# Altium PCB STC8051.PcbDoc
Units mil, origin at the board's own origin, x right, y up, seen from the top; angles counter-clockwise.
Board outline 1970 x 1985 mil, 2 copper layers (Top Layer, Bottom Layer); 31 components, 52 nets, 177 pads, 0 vias.
Unrouted connection lines stored in the file: 95.
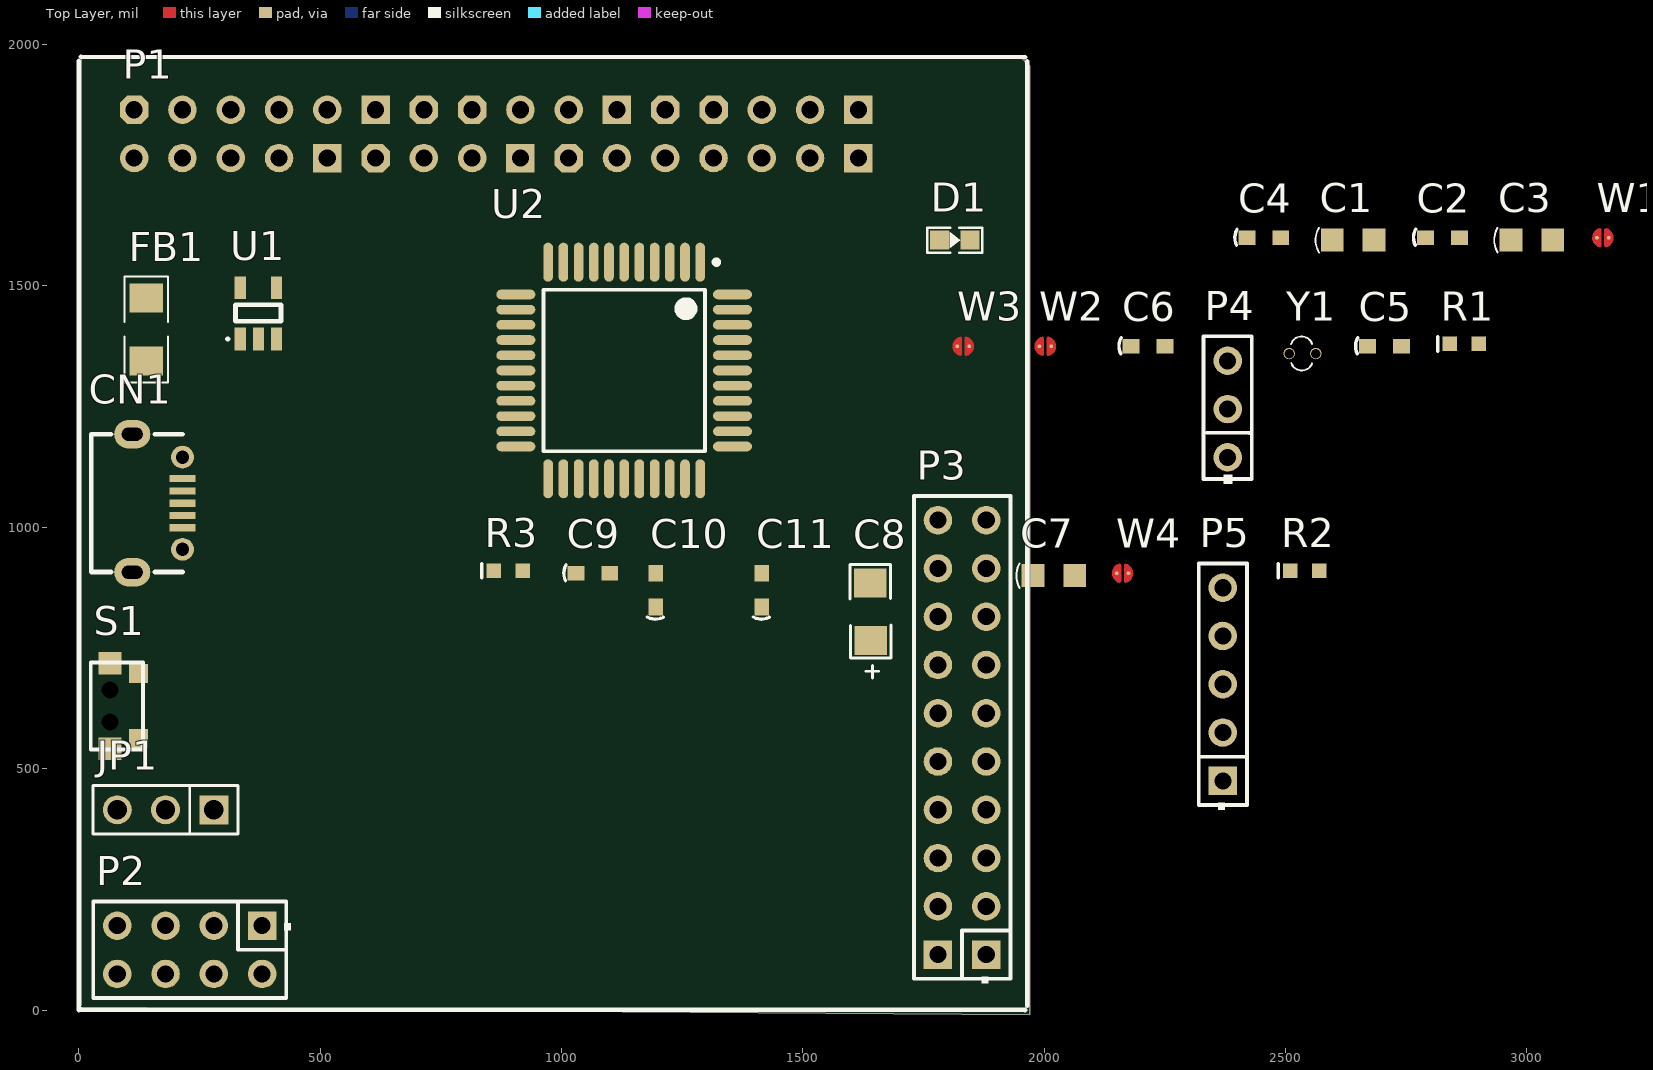
[diagram p0: Top Layer view]
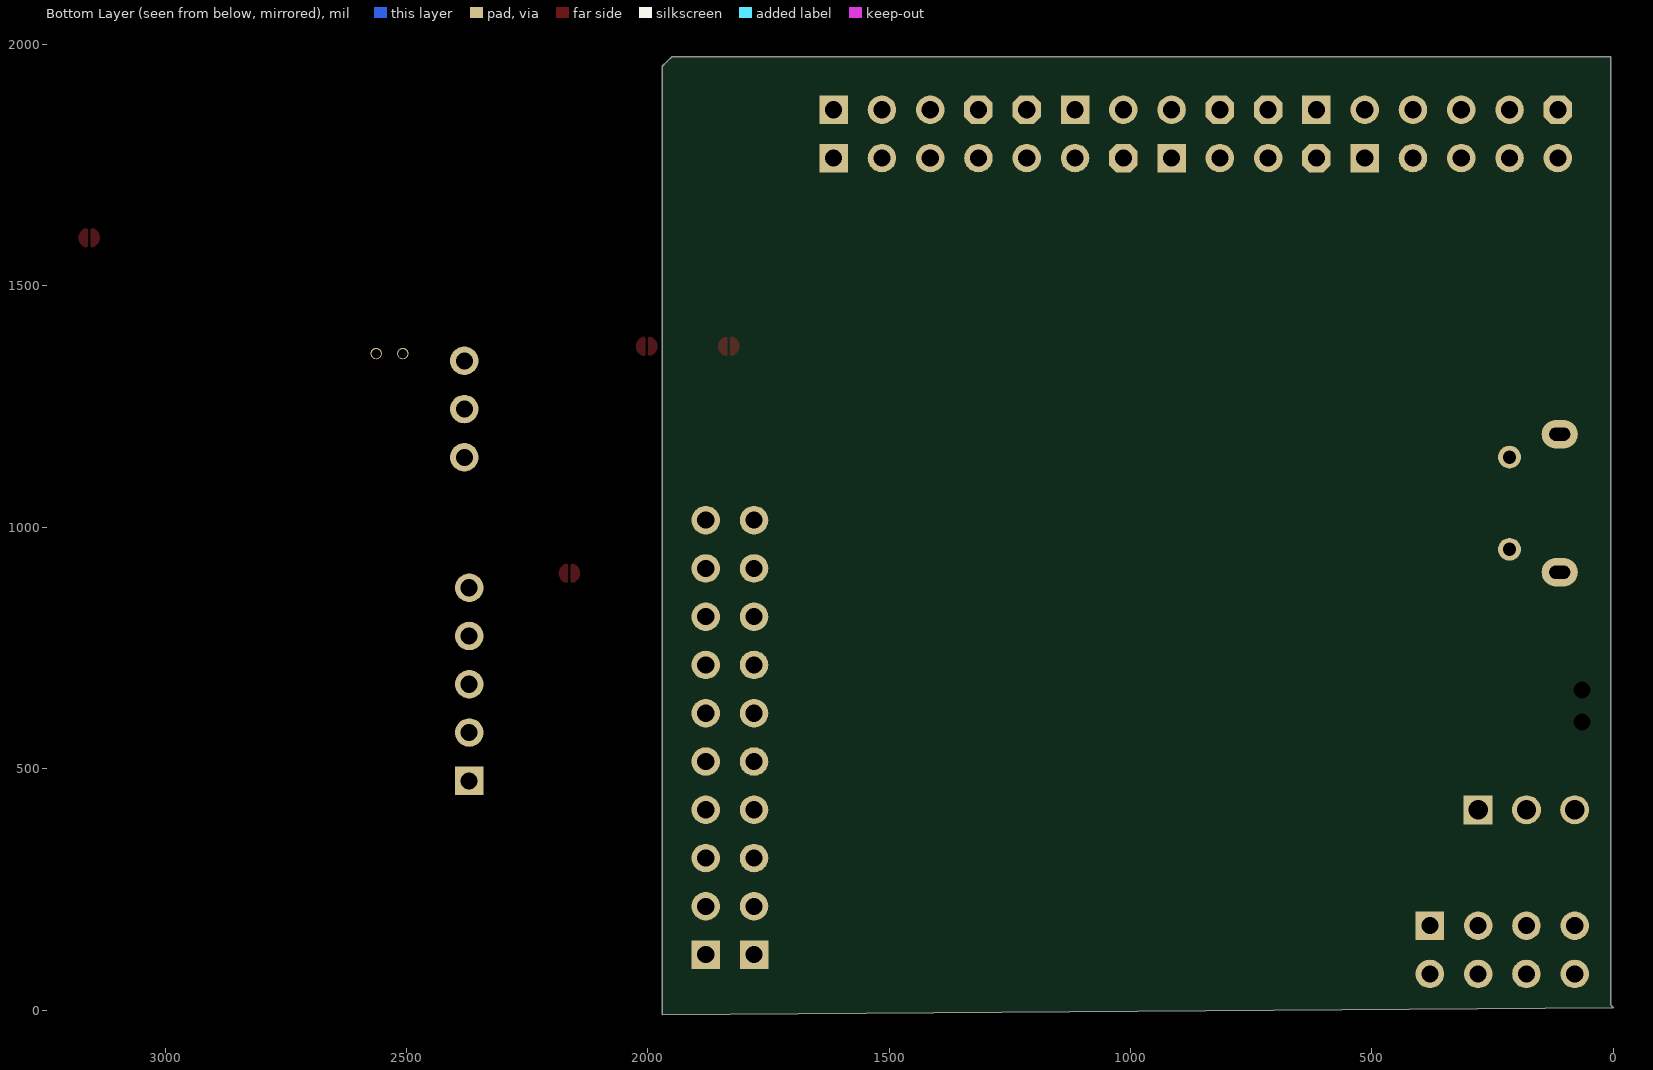
[diagram p1: Bottom Layer view, seen from below]

## Layer stack, top to bottom
Top Solder: solder mask 0.4, Solder Resist, Dk 3.5
Top Layer: signal copper 1.4
Dielectric 1: dielectric 12.6, FR-4, Dk 4.8
Bottom Layer: signal copper 1.4
Bottom Solder: solder mask 0.4, Solder Resist, Dk 3.5

## Board outline
0,5 5,10 5,1975 1950,1975 1960,1965 1970,1955 1970,-10

## Design rules (kind name [scope] priority, off if disabled: settings)
Clearance [All] p1: gap=10
PolygonConnect [All] p1: connectstyle=Relief reliefconductorwidth=10 reliefentries=4 polygonreliefangle="90 Angle" airgapwidth=10
RoomDefinition 8051 [InComponentClass('8051')] p1: confinementstyle=ConfineIn formatcopy=TRUE lockcomponents=FALSE outline -10,5 1985,5 1985,1980 -10,1980
RoutingVias [All] p1: holewidth=28 width=50 viastyle="Through Hole" minholewidth=28 minwidth=50 maxholewidth=28 maxwidth=50
SolderMaskExpansion [All] p1: expansion=4
Width [All] p1: maxlimit=10 minlimit=10 preferedwidth=10
29 further rules are at their usual default settings.

## Components (designator, comment, footprint, x,y, rotation, side; value= is the part's Value field where it differs from the comment)
C1 "10uF" C0805 2640,1595 r0 top
C2 "100nF" C0603L 2825,1600 r0 top
C3 "10uF" C0805 3010,1595 r0 top
C4 "100nF" C0603L 2455,1600 r0 top
C5 "22pF" C0603L 2705,1375 r0 top
C6 "22pF" C0603L 2215,1375 r0 top
C7 "10uF" C0805 2020,900 r0 top
C8 "10uF" TAJ-A 1640,775 r90 top
C9 "1uF" C0603L 1065,905 r0 top
C10 "0.1uF" C0603L 1195,870 r90 top
C11 "0.1uF" C0603L 1415,870 r90 top
CN1 "USB-Micro" USB_MICRO_5S_B 215,1050 r90 top
D1 "RED" SMT_LED_0603 1815,1595 r0 top
FB1 "500mA" R1206 140,1410 r90 top
JP1 "JP3" SIP3 280,415 r180 top
P1 "WIKIPRHL-R" WIKIPRHL-R 1615,1865 r180 top
P2 "WIKIPWR_EX" WIKIPWR_EX 380,175 r180 top
P3 "WIKIGPIO-D" WIKIGPIO-D 1880,115 r90 top
P4 "Header 3" HDR1X3/2.54mm 2380,1145 r90 top
P5 "Header 5" HDR1X5/2.54MM 2370,475 r90 top
R1 "10K" R0603 2870,1380 r0 top
R2 "0R" R0603 2540,910 r0 top
R3 "10K" R0603 890,910 r0 top
S1 "RESET" KEY-2x4-SMD 65,630 r90 top
U1 "LDO" SOT23-5 335,1390 r0 top
U2 "STC8051" TQFP44 1130,1325 r270 top
W1 "Jumper" Solderbridge 3145,1600 r0 top
W2 "Jumper" Solderbridge 1990,1375 r0 top
W3 "Jumper" Solderbridge 1820,1375 r0 top
W4 "Jumper" Solderbridge 2150,905 r0 top
Y1 "12MHz" XTAL0602 2535,1360 r0 top

## Footprints (in the part's own frame and the unit in brackets; to place one, negate y for a bottom-side part, rotate by r counter-clockwise, add the part's x,y. Pads: shape width x height; smd on the part's side, far side on the other; paste and mask are expansions set on the pad)
C0603L [mil]
  rect 35x30 smd: 1(-35,0) 2(35,0)
  silkscreen extent -60,-16 -56,18, body extent -31,-16 32,15, height 24
C0805 [mm]
  rect 1.2x1.2 smd: 1(-1.1,0) 2(1.1,0)
  silkscreen extent -1.97,-0.65 -1.8,0.65, body extent -0.99,-0.61 1.01,0.59, height 1.2
HDR1X3/2.54mm [mm]
  round 1.5 hole 0.9: 1(0,0) 2(2.54,0) 3(5.08,0)
  silkscreen extent -1.4,-1.27 6.38,1.27, body extent -1.19,-1.45 6.43,1.47, height 8.51
HDR1X5/2.54MM [mm] "Connector; Header; 5 Position"
  rect 1.5x1.5 hole 0.9: 1(0,0)
  round 1.5 hole 0.9: 2(2.54,0) 3(5.08,0) 4(7.62,0) 5(10.16,0)
  silkscreen extent -1.52,-1.27 11.43,1.27, body extent -1.29,-1.45 11.41,1.47, height 8.51
KEY-2x4-SMD [mm] "6.8MM,2.8MM,SMD"
  rect 1.2x1.2 smd: 0(-2.25,0) 0(2.25,0)
  rect 1x1 smd: 1(-1.7,-1.5) 2(1.7,-1.5)
  round 0.8 hole 0.9 unplated: MH1(0.85,0) MH2(-0.85,0)
  silkscreen extent -2.29,-1.73 2.29,1.02, body extent -2.28,-1.6 2.29,0.94, height 1.1
R0603 [mil]
  rect 30x30 smd: 1(-30,0) 2(30,0)
  silkscreen extent -55,-15 -55,15, body extent -31,-16 32,15, height 18
R1206 [mil]
  rect 60x70 smd: 1(-65,0) 2(65,0)
  silkscreen extent -110,-45 110,45, body extent -62,-31 63,32, height 24
SIP3 [mil]
  rect 60x60 hole 40: 1(0,0)
  round 60 hole 40: 2(100,0) 3(200,0)
  silkscreen extent -50,-50 250,50
SMT_LED_0603 [mm] "SMT LED"
  rect 1x1 smd: 1(-0.8,0) 2(0.8,0)
  silkscreen extent -1.45,-0.66 1.45,0.66, body extent -0.81,-0.4 0.81,0.4, height 0.6
Solderbridge [mm]
  round 0.2 smd paste-10: 1(0,0) 2(0.625,0)
  Top Layer region: 0.236,-0.432 0.16,-0.505 0.042,-0.467 -0.023,-0.424 -0.097,-0.351 -0.15,-0.292 -0.208,-0.193 -0.236,-0.099 -0.231,0.122 -0.206,0.193 -0.122,0.33 -0.038,0.411 0.054,0.469 0.155,0.5 0.206,0.483 0.236,0.43
  Top Layer region: 0.389,0.432 0.465,0.505 0.583,0.467 0.648,0.424 0.721,0.351 0.775,0.292 0.833,0.193 0.861,0.099 0.856,-0.122 0.831,-0.193 0.747,-0.33 0.663,-0.411 0.571,-0.469 0.47,-0.5 0.419,-0.483 0.389,-0.43
  Top Layer lines w0.152: 0.159,-0.431 cw(c0.27,0) 0.159,0.431 ; 0.465,-0.431 ccw(c0.355,0) 0.465,0.431
SOT23-5 [mm]
  rect 0.6x1.2 smd: 1(0,0) 2(0.95,0) 3(1.9,0) 4(1.9,2.7) 5(0,2.7)
  silkscreen extent -0.69,0 2.13,1.8, body extent -0.32,0.7 2.35,2.1, height 1.1
TAJ-A [mil] "TAJ CAP A TYPE 3216"
  rect 60x66.93 smd: 1(-9,-1) 2(110,0)
  silkscreen extent -87,-43 148,42
TQFP44 [mm] "Thin QFP, 44-Leads, Body 10x10mm, Pitch 0.8mm, IPC Low Density"
  oval 2.05x0.508 smd: 1(-5.7,4) 2(-5.7,3.2) 3(-5.7,2.4) 4(-5.7,1.6) 5(-5.7,0.8) 6(-5.7,0) 7(-5.7,-0.8) 8(-5.7,-1.6) 9(-5.7,-2.4) 10(-5.7,-3.2) 11(-5.7,-4) 23(5.7,-4) 24(5.7,-3.2) 25(5.7,-2.4) 26(5.7,-1.6) 27(5.7,-0.8) 28(5.7,0) 29(5.7,0.8) 30(5.7,1.6) 31(5.7,2.4) 32(5.7,3.2) 33(5.7,4)
  oval 0.508x2.05 smd: 12(-4,-5.7) 13(-3.2,-5.7) 14(-2.4,-5.7) 15(-1.6,-5.7) 16(-0.8,-5.7) 17(0,-5.7) 18(0.8,-5.7) 19(1.6,-5.7) 20(2.4,-5.7) 21(3.2,-5.7) 22(4,-5.7) 34(4,5.7) 35(3.2,5.7) 36(2.4,5.7) 37(1.6,5.7) 38(0.8,5.7) 39(0,5.7) 40(-0.8,5.7) 41(-1.6,5.7) 42(-2.4,5.7) 43(-3.2,5.7) 44(-4,5.7)
  silkscreen extent -5.82,-4.25 4.25,4.98, body extent -5,-5 5,5, height 1.2
USB_MICRO_5S_B [mil] "USB Micro SMT 5S B"
  oval 59.06x74.8 hole 27.56 slot 43.31 at 90 deg: 0(-143,104) 0(143,104)
  round 47.24 hole 27.5: 0(-95.5,0) 0(95.5,0)
  rect 15x54 smd: 1(51,0) 2(25.5,0) 3(0,0) 4(-25.5,0) 5(-51,0)
  silkscreen extent -143,0 143,189, body extent -161,-9 161,204, height 105
WIKIGPIO-D [mm] "Connector; Header; 9x2 Position"
  rect 1.5x1.5 hole 0.9: 1(0,0) 2(0,2.54)
  round 1.5 hole 0.9: 3(2.54,0) 4(2.54,2.54) 5(5.08,0) 6(5.08,2.54) 7(7.62,0) 8(7.62,2.54) 9(10.16,0) 10(10.16,2.54) 11(12.7,0) 12(12.7,2.54) 13(15.24,0) 14(15.24,2.54) 15(17.78,0) 16(17.78,2.54) 17(20.32,0) 18(20.32,2.54) 19(22.86,0) 20(22.86,2.54)
  silkscreen extent -1.52,-1.27 24.13,3.81
WIKIPRHL-R [mm] "Connector; Header; 16x2 Position"
  rect 1.5x1.5 hole 0.9: 1(0,0) 2(0,2.54) 11(12.7,0) 16(17.78,2.54) 21(25.4,0) 24(27.94,2.54)
  round 1.5 hole 0.9: 3(2.54,0) 4(2.54,2.54) 5(5.08,0) 6(5.08,2.54) 8(7.62,2.54) 10(10.16,2.54) 12(12.7,2.54) 13(15.24,0) 15(17.78,0) 18(20.32,2.54) 20(22.86,2.54) 23(27.94,0) 25(30.48,0) 26(30.48,2.54) 27(33.02,0) 28(33.02,2.54) 29(35.56,0) 30(35.56,2.54) 32(38.1,2.54)
  oct 1.5x1.5 hole 0.9: 7(7.62,0) 9(10.16,0) 14(15.24,2.54) 17(20.32,0) 19(22.86,0) 22(25.4,2.54) 31(38.1,0)
WIKIPWR_EX [mm] "Connector; Header; 4x2 Position"
  rect 1.5x1.5 hole 0.9: 1(0,0)
  round 1.5 hole 0.9: 2(0,2.54) 3(2.54,0) 4(2.54,2.54) 5(5.08,0) 6(5.08,2.54) 7(7.62,0) 8(7.62,2.54)
  silkscreen extent -1.52,-1.27 8.89,3.81
XTAL0602 [mm]
  round 0.6 hole 0.5: 1(-0.7,0) 2(0.7,0)
  silkscreen extent -0.59,-0.89 0.51,0.9

## Part data
C1 C2 C3 C4 C5 C6 C7 C9 C10 C11: library part Cap, "Capacitor"
C8: library part "Cap Pol1", "Polarized Capacitor (Radial)"
D1: library part LED0, "Typical INFRARED GaAs LED"
FB1: library part FB, "Ferrite Beads Inductors Impedance:120Ω±25% Rated Current:1500mA DC Resistance:0.095Ω"
P1: "Header, 16-Pin, Dual row"
P2: "PWR HDR"
P3: "Header, 9-Pin, Dual row"
P4: "Header, 3-Pin"
P5: "Header, 5-Pin"
R1 R2 R3: library part Res2, "Resistor"
S1: library part SW-PB, "Switch"
U1: library part LDO-SOT23-5, "General LDO SOT23-5"
U2: library part STC12LE5A, "STC12LE5A"
W1 W2 W3 W4: "Jumper Wire"
Y1: library part XTAL, "Crystal Oscillator"

## Nets (pads, with @x,y where several pads share a name; then routed paths per layer and width w, separated by ;. In a path a pad name is that pad's centre, name@x,y a point inside that pad or via, vN(x,y) a via of type N, cw(c..) or ccw(c..) an arc to the next point about the centre after c; other vN are vias at no path point)
51AIN0/CO2: P5.2 U2.40
51AIN1: P5.3 U2.41
51AIN2: P5.4 U2.42
51AIN3/CPP0: U2.43 W3.2 W4.2
51AIN4/CPP1/SS: U2.44 W1.1 W2.2
51INT0: P1.19 U2.8
51INT1: P1.22 U2.9
51MISO: P1.6 U2.2
51MOSI: P1.4 U2.1
51NRST: C7.1 P2.6 R3.2 S1.1 U2.4
51RX1: P1.15 U2.5
51RX2: P1.32 U2.39
51SCK: P1.8 U2.3
51T0: P1.23 U2.10
51T1: P1.25 U2.11
51TX1: P1.13 U2.7
51TX2: P1.30 U2.6
51VDD: C7.2 C8.1 C9.2 C10.2 C11.2 JP1.2 P2.1 P3.1 R1.2 R2.2 S1.2 U2.38
51XTAL1: C6.2 U2.15 Y1.1
51XTAL2: C5.2 U2.14 Y1.2
D3V3: C3.1 C4.1 JP1.1 U1.5
GND: C1.2 C2.2 C3.2 C4.2 C5.1 C6.1 C8.2 C9.1 C10.1 C11.1 CN1.0 CN1.5 D1.2 P1.1 P1.2 P1.11 P1.16 P1.21 P1.24 P2.2 P2.4 P3.2 P4.1 P5.1 R3.1 U1.2 U2.16
NetC1_1: C1.1 C2.1 FB1.2 U1.1 U1.3
NetD1_1: D1.1 R1.1
NetP1_10: P1.10 W1.2
NetP4_2: P4.2 W3.1
NetP4_3: P4.3 W2.1
NetP5_5: P5.5 W4.1
P0.0: P1.3 U2.37
P0.1: P1.5 U2.36
P0.2: P1.7 U2.35
P0.3: U2.34
P0.4: P3.20 U2.33
P0.5: P3.19 U2.32
P0.6: P3.18 U2.31
P0.7: P3.17 U2.30
P2.0: U2.18
P2.1: U2.19
P2.2: P3.3 U2.20
P2.3: U2.21
P2.4: P3.5 U2.22
P2.5: P3.6 U2.23
P2.6: P3.7 U2.24
P2.7: P3.8 U2.25
P3.6: P1.18 U2.12
P3.7: P1.20 U2.13
P4.0: U2.17
P4.1: U2.28
P4.4: U2.26
P4.5: U2.27
P4.6: R2.1 U2.29
USB5V: CN1.1 FB1.1 JP1.3
pads on no net: CN1.2 CN1.3 CN1.4 P1.9 P1.12 P1.14 P1.17 P1.26 P1.27 P1.28 P1.29 P1.31 P2.3 P2.5 P2.7 P2.8 P3.4 P3.9 P3.10 P3.11 P3.12 P3.13 P3.14 P3.15 P3.16 S1.0 S1.MH1 S1.MH2 U1.4

## Silkscreen, mask and mechanical layers (free items; w line width, h text height)
Top Overlay:
  lines w10: 0,0 0,1966.06 ; 5,1.06 1960,0 ; 5,1975 1960,1973.94 ; 1965,8.94 1965,1965